# Altium PCB PCB1.PcbDoc
Units mm, origin at the board's own origin, x right, y up, seen from the top; angles counter-clockwise.
Board outline 25.4 x 21.34 mm, 2 copper layers (Top Layer, Bottom Layer); 3 components, 16 nets, 32 pads, 0 vias.
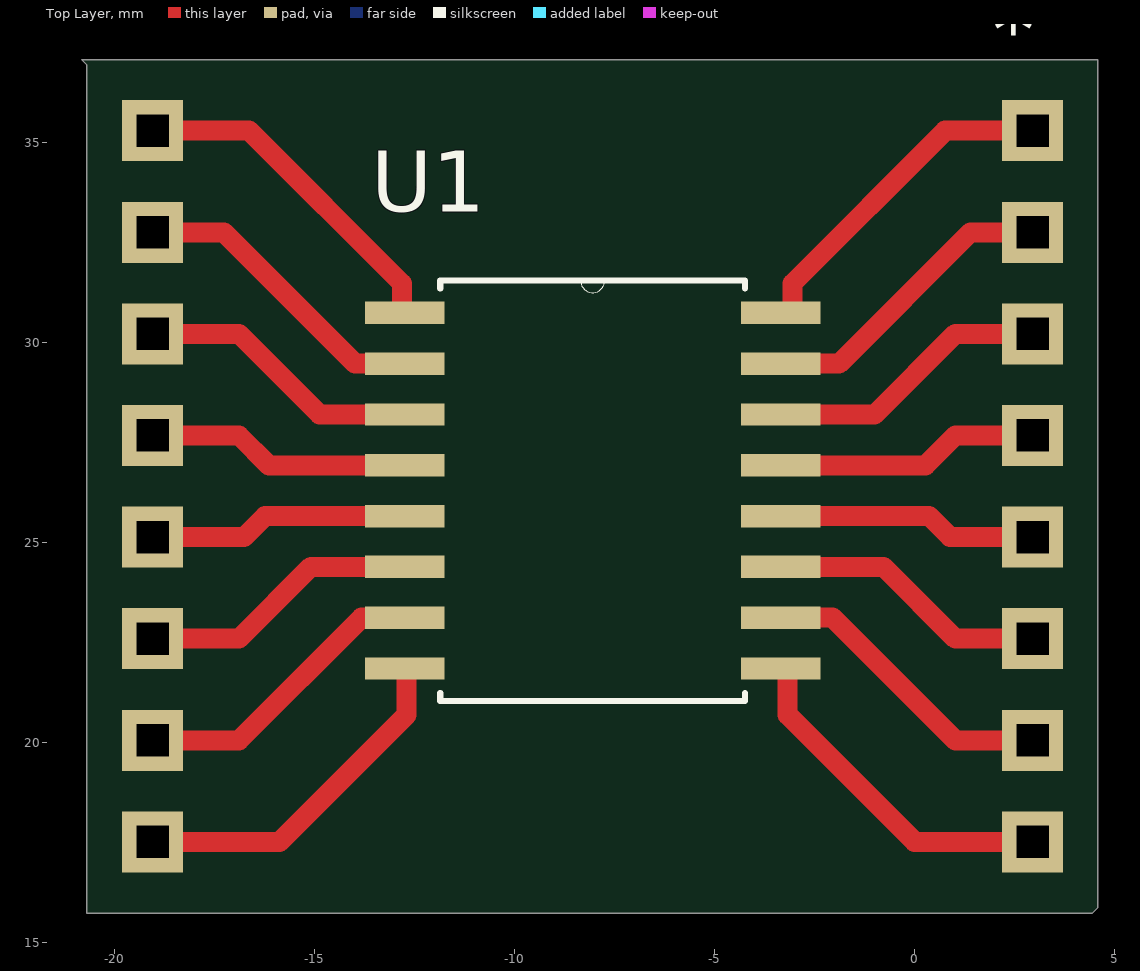
[diagram p0: Top Layer view]
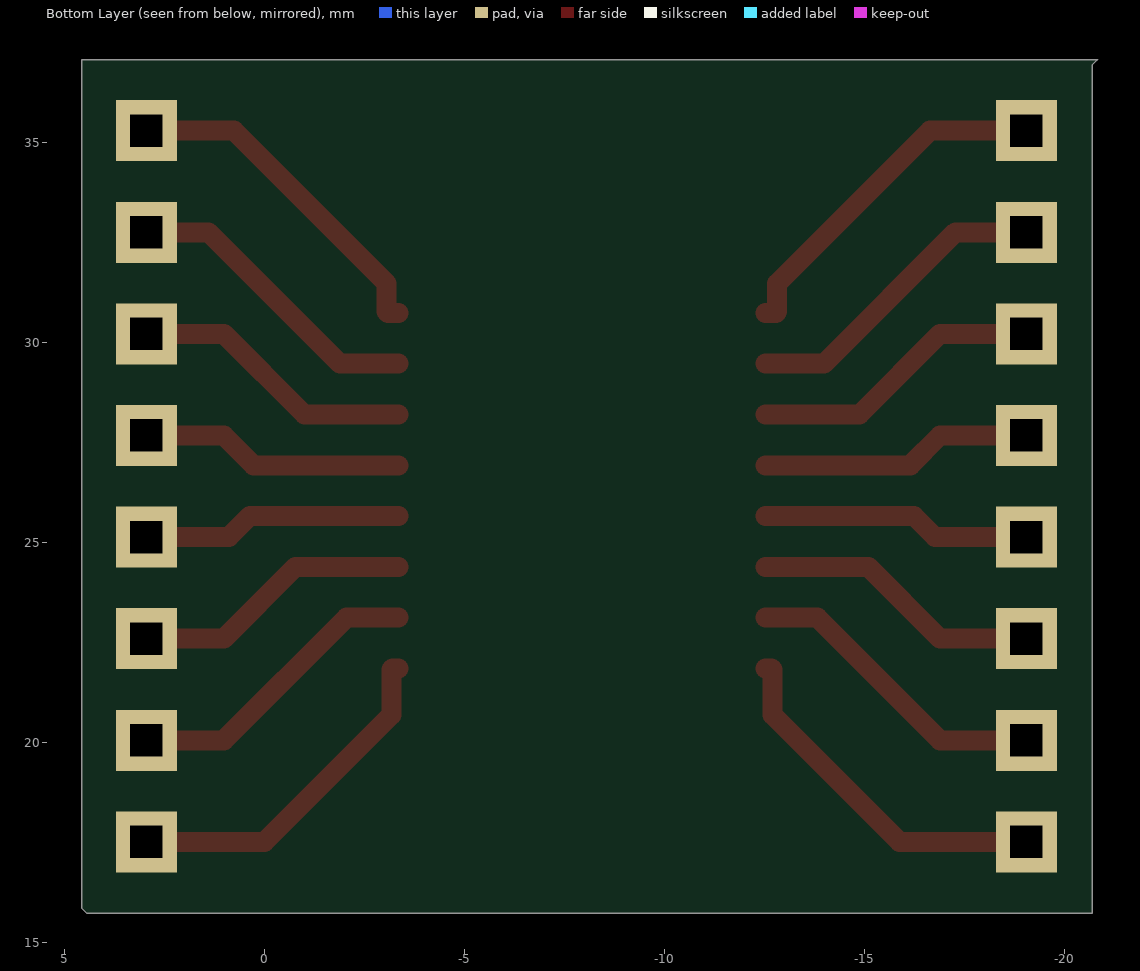
[diagram p1: Bottom Layer view, seen from below]
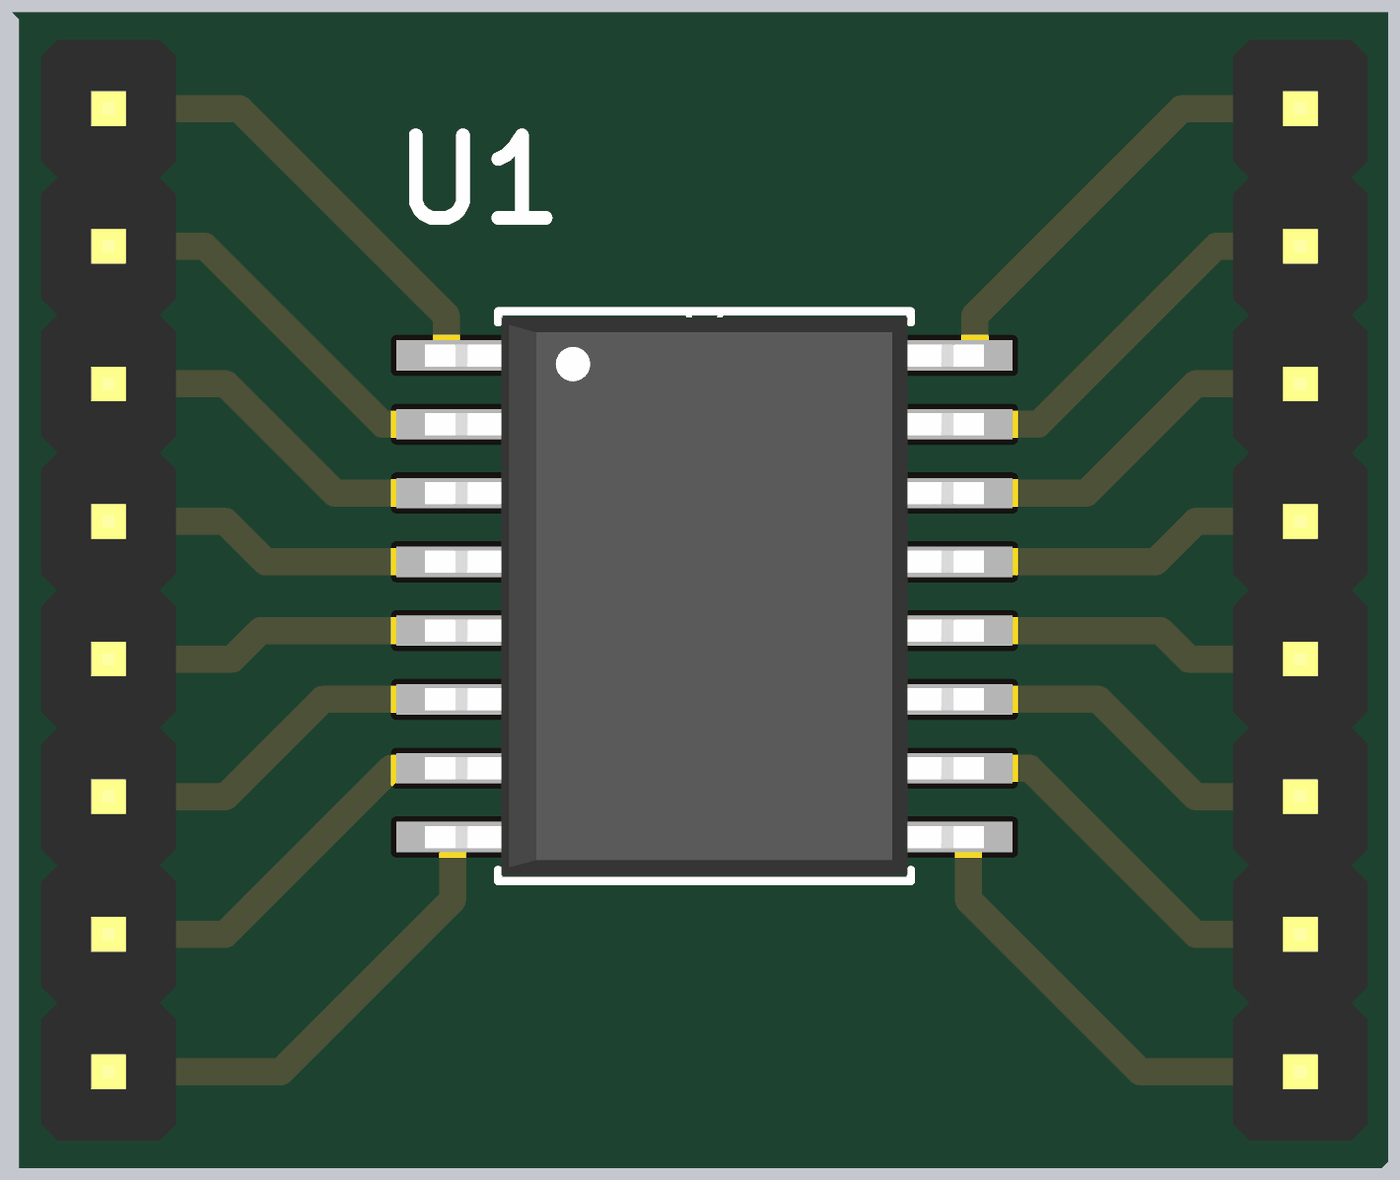
[diagram p2: 3D render of the assembled board from above, using the file's embedded part models]

## Layer stack, top to bottom
Top Solder: solder mask 0.0102, Solder Resist, Dk 3.5
Top Layer: signal copper 0.0356
Dielectric 1: dielectric 0.32, FR-4, Dk 4.8
Bottom Layer: signal copper 0.0356
Bottom Solder: solder mask 0.0102, Solder Resist, Dk 3.5

## Board outline
-20.701,15.748 4.445,15.748 4.572,15.875 4.572,37.084 -20.828,37.084 -20.701,36.957

## Design rules (kind name [scope] priority, off if disabled: settings)
Clearance [All] p1: gap=0.254 ignorepadtopadclearanceinfootprint=FALSE except(0: Arc-Hole Track-Hole SMDPad-Hole THPad-Hole Via-Hole Fill-Hole Poly-Hole Region-Hole Text-Hole)
PolygonConnect [All] p1: connectstyle=Relief reliefconductorwidth=0.254 reliefentries=4 polygonreliefangle="90 Angle" airgapwidth=0.254
RoutingVias [All] p1: holewidth=0.711 width=1.27 viastyle="Through Hole" minholewidth=0.711 minwidth=1.27 maxholewidth=0.711 maxwidth=1.27
SolderMaskExpansion [All] p1: expansion=0.102 istentingtop=FALSE
Width [All] p1: maxlimit=2 minlimit=0.254 preferedwidth=0.254 minimp=50.000000 maximp=50.000000 favimp=50.000000
30 further rules are at their usual default settings.

## Classes and differential pairs
component class Sheet1: U1

## Components (designator, comment, footprint, x,y, rotation, side; value= is the part's Value field where it differs from the comment)
* "8xPinHeaderAD725-2" 8xHeaderAD725-2 2.95,35.306 r270 top
* "8xPinHeaderAD725" 8xHeaderAD725-1 -19.05,35.306 r270 top
U1 "ADUM1411ARWZ-RL" SOIC127P1032X265-16N -8.05,26.306 r0 top

## Footprints (in the part's own frame and the unit in brackets; to place one, negate y for a bottom-side part, rotate by r counter-clockwise, add the part's x,y. Pads: shape width x height; smd on the part's side, far side on the other; paste and mask are expansions set on the pad)
8xHeaderAD725-1 [mil]
  rect 60x60 hole 31.5 square: 1(0,0) 2(100,0) 3(200,0) 4(300,0) 5(400,0) 6(500,0) 7(600,0) 8(700,0)
  body extent -50,-49 750,49, height 336
8xHeaderAD725-2 [mil]
  rect 60x60 hole 31.5 square: 9(700,0) 10(600,0) 11(500,0) 12(400,0) 13(300,0) 14(200,0) 15(100,0) 16(0,0)
  body extent -50,-49 750,49, height 336
SOIC127P1032X265-16N [mil]
  rect 78x22 smd: 1(-185,175) 2(-185,125) 3(-185,75) 4(-185,25) 5(-185,-25) 6(-185,-75) 7(-185,-125) 8(-185,-175) 9(185,-175) 10(185,-125) 11(185,-75) 12(185,-25) 13(185,25) 14(185,75) 15(185,125) 16(185,175)
  silkscreen extent -150,-207 150,207, body extent -203,-203 203,203, height 105

## Part data
U1: "General Purpose Digital Isolator 3750Vrms 4 Channel 1Mbps 25kV/Âµs CMTI 16-SOIC (0.295, 7.50mm Width)", Package="SOIC -16 Analog Devices", Check_prices=https://www.snapeda.com/parts/ADUM1411ARWZ-RL/Analog%20Devices%20Inc./view-part/218128/?ref=eda, Digi-Key_Part_Number=ADUM1411ARWZ-RLCT-ND, MF="Analog Devices", MP=ADUM1411ARWZ-RL, Purchase-URL=https://pricing.snapeda.com/search/part/ADUM1411ARWZ-RL/?ref=eda, SnapEDA_Link=https://www.snapeda.com/parts/ADUM1411ARWZ-RL/Analog%20Devices%20Inc./view-part/218128/?ref=snap

## Nets (pads, with @x,y where several pads share a name; then routed paths per layer and width w, separated by ;. In a path a pad name is that pad's centre, name@x,y a point inside that pad or via, vN(x,y) a via of type N, cw(c..) or ccw(c..) an arc to the next point about the centre after c; other vN are vias at no path point)
Net*_1: *.1 U1.1 | length 8.6
  Top Layer w0.5: *.1@-18.825,35.306 -16.637,35.306 -12.819,31.488 -12.819,30.78 -12.789,30.751 U1.1@-12.524,30.751
Net*_2: *.2 U1.2 | length 7.7
  Top Layer w0.5: *.2@-18.825,32.766 -17.272,32.766 -13.987,29.481 U1.2@-12.524,29.481
Net*_3: *.3 U1.3 | length 7.1
  Top Layer w0.5: *.3@-18.825,30.226 -16.891,30.226 -14.876,28.211 U1.3@-12.524,28.211
Net*_4: *.4 U1.4 | length 6.6
  Top Layer w0.5: *.4@-18.825,27.686 -16.891,27.686 -16.146,26.941 U1.4@-12.524,26.941
Net*_5: *.5 U1.5 | length 6.5
  Top Layer w0.5: *.5@-18.825,25.146 -16.764,25.146 -16.239,25.671 U1.5@-12.524,25.671
Net*_6: *.6 U1.6 | length 7
  Top Layer w0.5: *.6@-18.825,22.606 -16.891,22.606 -15.096,24.401 U1.6@-12.524,24.401
Net*_7: *.7 U1.7 | length 7.6
  Top Layer w0.5: *.7@-18.825,20.066 -16.891,20.066 -13.826,23.131 U1.7@-12.524,23.131
Net*_8: *.8 U1.8 | length 8.8
  Top Layer w0.5: *.8@-18.825,17.526 -15.875,17.526 -12.7,20.701 -12.7,21.832 -12.671,21.861 U1.8@-12.524,21.861
Net*_9: *.9 U1.9 | length 8.8
  Top Layer w0.5: U1.9 -3.204,21.861 -3.175,21.832 -3.175,20.701 0,17.526 *.9
Net*_10: *.10 U1.10 | length 7.6
  Top Layer w0.5: U1.10 -2.049,23.131 1.016,20.066 *.10
Net*_11: *.11 U1.11 | length 7
  Top Layer w0.5: U1.11 -0.779,24.401 1.016,22.606 *.11
Net*_12: *.12 U1.12 | length 6.5
  Top Layer w0.5: U1.12 0.364,25.671 0.889,25.146 *.12
Net*_13: *.13 U1.13 | length 6.6
  Top Layer w0.5: U1.13 0.271,26.941 1.016,27.686 *.13
Net*_14: *.14 U1.14 | length 7.1
  Top Layer w0.5: U1.14 -0.999,28.211 1.016,30.226 *.14
Net*_15: *.15 U1.15 | length 7.7
  Top Layer w0.5: U1.15 -1.888,29.481 1.397,32.766 *.15
Net*_16: *.16 U1.16 | length 8.6
  Top Layer w0.5: U1.16 -3.086,30.751 -3.056,30.78 -3.056,31.488 0.762,35.306 *.16

## Silkscreen, mask and mechanical layers (free items; w line width, h text height)
Mechanical 1:
  lines w0.254: -20.701,15.748 -20.701,36.957 -20.574,37.084 4.318,37.084 4.572,36.83 4.572,15.875 4.445,15.748 -20.701,15.748

## Text inside footprints (layer, text, board x,y; h text height)
U1: Mechanical 13 "*" at -13.576,31.195 h1.27